# EAGLE board headstageNanoPolymerProbes (EAGLE 8.3.2)
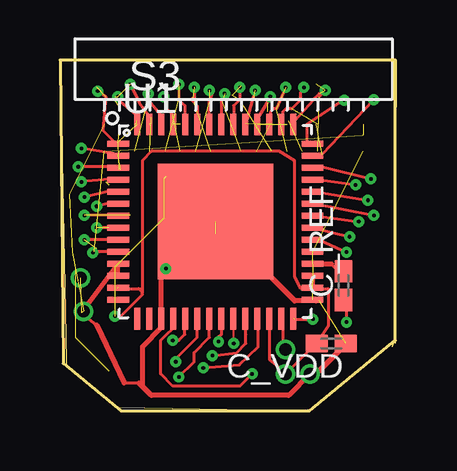
[diagram p0: board, top side]
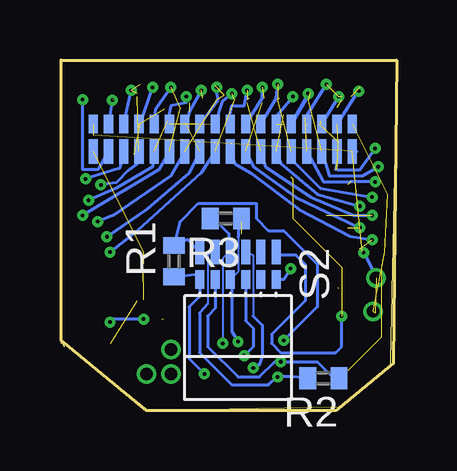
[diagram p1: board, bottom side, seen from below]

Size 14.02 x 14.6 mm. Coordinates in mm from the lower left corner, seen from the top.
Outline: 10.34,0 2.41,0.13 0.25,1.9 0.25,2.03 0,14.6
Outline: 10.34,0 13.89,2.87 13.84,2.67 13.97,2.92
Outline: 13.97,2.92 13.97,2.79 14.02,14.6 0,14.6
Outline: 0,14.6 0,14.6 13.97,14.6 13.97,2.92
Outline: 0,14.6 0.13,1.97 2.54,0 10.34,0
Outline: 10.34,0 10.41,0 13.97,2.92
Copper layers (1*16): Top 0.0178mm / dielectric 59mil / Bottom 0.0178mm
Design rules "default *": minimum track width 5mil, minimum drill 10mil, track to track 0.05588125mm, track to pad 5mil, pad to pad 5mil, via to via 5mil, smd to smd 5mil, copper to edge 10mil, drill to drill 16mil, minimum pad ring 6mil, minimum via ring 6mil, stop-mask expansion 3mil, vias tented up to drill 0mil, thermal gap 10mil

## Footprints (pad centres in the part's own frame; a part is rotated, then mirrored left to right if it is on the bottom)
C0402K = smd 0.925 x 0.74: 1 -0.6,0; 2 0.6,0
R0402 = smd 0.7 x 0.9: 1 -0.65,0; 2 0.65,0
OMNETICS_PZN-12-AA = smd 0.381 x 0.762: B1 1.587,-1.016; B2 0.953,-1.016; B3 0.318,-1.016; B4 -0.318,-1.016; B5 -0.953,-1.016; B6 -1.587,-1.016 | smd 0.381 x 1.016: T1 1.587,-2.159; T2 0.953,-2.159; T3 0.318,-2.159; T4 -0.318,-2.159; T5 -0.953,-2.159; T6 -1.587,-2.159
OMNETICS_A79025 = smd 0.381 x 0.762 bottom: B1 -5.397,-1.016; B2 -4.763,-1.016; B3 -4.128,-1.016; B4 -3.493,-1.016; B5 -2.857,-1.016; B6 -2.223,-1.016; B7 -1.587,-1.016; B8 -0.953,-1.016; B9 -0.318,-1.016; B10 0.318,-1.016; B11 0.953,-1.016; B12 1.587,-1.016; B13 2.223,-1.016; B14 2.857,-1.016; B15 3.493,-1.016; B16 4.128,-1.016; B17 4.763,-1.016; B18 5.397,-1.016 | smd 0.381 x 1.016 bottom: T1 -5.397,-2.159; T2 -4.763,-2.159; T3 -4.128,-2.159; T4 -3.493,-2.159; T5 -2.857,-2.159; T6 -2.223,-2.159; T7 -1.587,-2.159; T8 -0.953,-2.159; T9 -0.318,-2.159; T10 0.318,-2.159; T11 0.953,-2.159; T12 1.587,-2.159; T13 2.223,-2.159; T14 2.857,-2.159; T15 3.493,-2.159; T16 4.128,-2.159; T17 4.763,-2.159; T18 5.397,-2.159
QFN56_8_X_8_LARGE = smd 0.9 x 0.25: 1 -4.05,3.25; 2 -4.05,2.75; 3 -4.05,2.25; 4 -4.05,1.75; 5 -4.05,1.25; 6 -4.05,0.75; 7 -4.05,0.25; 8 -4.05,-0.25; 9 -4.05,-0.75; 10 -4.05,-1.25; 11 -4.05,-1.75; 12 -4.05,-2.25; 13 -4.05,-2.75; 14 -4.05,-3.25; 29 4.05,-3.25; 30 4.05,-2.75; 31 4.05,-2.25; 32 4.05,-1.75; 33 4.05,-1.25; 34 4.05,-0.75; 35 4.05,-0.25; 36 4.05,0.25; 37 4.05,0.75; 38 4.05,1.25; 39 4.05,1.75; 40 4.05,2.25; 41 4.05,2.75; 42 4.05,3.25 | smd 0.25 x 0.9: 15 -3.25,-4.05; 16 -2.75,-4.05; 17 -2.25,-4.05; 18 -1.75,-4.05; 19 -1.25,-4.05; 20 -0.75,-4.05; 21 -0.25,-4.05; 22 0.25,-4.05; 23 0.75,-4.05; 24 1.25,-4.05; 25 1.75,-4.05; 26 2.25,-4.05; 27 2.75,-4.05; 28 3.25,-4.05; 43 3.25,4.05; 44 2.75,4.05; 45 2.25,4.05; 46 1.75,4.05; 47 1.25,4.05; 48 0.75,4.05; 49 0.25,4.05; 50 -0.25,4.05; 51 -0.75,4.05; 52 -1.25,4.05; 53 -1.75,4.05; 54 -2.25,4.05; 55 -2.75,4.05; 56 -3.25,4.05 | smd 4.8 x 4.8: CENTER 0,0

## Placement (x,y rotation side)
C_REF  10nF  [C0402K]  11.81,5.21 90 top
C_VDD  10uF  [C0402K]  11.3,2.79 180 top
R1  100  [R0402]  9.27,6.22 90 bottom
R2  100  [R0402]  3.05,1.35 180 bottom
R3  100  [R0402]  7.11,8 180 bottom
S2  RHD2000-CABLE-AMP-SIDE  [OMNETICS_PZN-12-AA]  6.6,4.45 180 bottom
S3  OMNETICS_A79025  [OMNETICS_A79025]  7.24,12.95 0 top
U1  RHD2132_QFN  [QFN56_8_X_8_LARGE]  6.48,7.87 0 top

## Library data of the parts
C_REF C_VDD R1-R3 = resistor
S2 U1 = RHD2000
S3 = RHD2000b

## Nets
ADC_REF: C_REF.1 U1.28
AUXOUT: U1.27
CS+: R1.2 S2.T1 U1.19
CS-: R1.1 S2.B1 U1.18
GND: C_REF.2 C_VDD.1 S2.B6 S3.B1 S3.T18 U1.11 U1.12 U1.17 U1.29 U1.32 U1.33 U1.CENTER
IN0: S3.T9 U1.9
IN1: S3.T8 U1.8
IN2: S3.T7 U1.7
IN3: S3.T6 U1.6
IN4: S3.T5 U1.5
IN5: S3.T4 U1.4
IN6: S3.T3 U1.3
IN7: S3.T2 U1.2
IN8: S3.B2 U1.1
IN9: S3.B3 U1.56
IN10: S3.B4 U1.55
IN11: S3.B5 U1.54
IN12: S3.B6 U1.53
IN13: S3.B7 U1.52
IN14: S3.B8 U1.51
IN15: S3.B9 U1.50
IN16: S3.B10 U1.49
IN17: S3.B11 U1.48
IN18: S3.B12 U1.47
IN19: S3.B13 U1.46
IN20: S3.B14 U1.45
IN21: S3.B15 U1.44
IN22: S3.B16 U1.43
IN23: S3.B17 U1.42
IN24: S3.T17 U1.41
IN25: S3.T16 U1.40
IN26: S3.T15 U1.39
IN27: S3.T14 U1.38
IN28: S3.T13 U1.37
IN29: S3.T12 U1.36
IN30: S3.T11 U1.35
IN31: S3.T10 U1.34
MISO1+: S2.T4 U1.25
MISO1-: S2.B4 U1.24
MOSI+: R3.2 S2.T3 U1.23
MOSI-: R3.1 S2.B3 U1.22
REF: S3.B18 S3.T1 U1.10
SCLK+: R2.2 S2.T2 U1.21
SCLK-: R2.1 S2.B2 U1.20
VDD: C_VDD.2 S2.T6 U1.13 U1.26 U1.30 U1.31

## Tracks (layer width: path | path; a pad name or v marks a point on that pad's centre or on a via)
ADC_REF  (via drill 0.15)  (1 unrouted)
  Top 0.127: C_REF.1 11.97,4.61 11.81,4.57 12.06,4.57 11.94,4.45 v11.94,3.68 | 9.78,4.06 9.78,3.81 v10.54,3.81
  Bottom 0.127: v10.54,3.81 11.81,3.81 v11.94,3.68
AUXOUT  (via drill 0.51)
  Top 0.127: v9.4,2.54 9.27,2.54 9.27,3.43 9.23,3.47 U1.27
CS+  (via drill 0.15)
  Top 0.127: v4.7,2.92 4.95,2.92 5.21,3.18 5.21,3.8 U1.19
  Bottom 0.127: v4.7,2.92 3.3,4.32 3.3,6.1 4.7,7.49 5.33,7.49 5.84,8 5.84,8.64 8.25,8.64 9.02,7.87 R1.2 8.71,7.13 S2.T1
CS-  (via drill 0.15)
  Top 0.127: v8,1.52 7.49,1.02 4.7,1.02 4.19,1.52 4.19,2.92 4.44,3.18 4.7,3.41 U1.18
  Bottom 0.076: 8.21,5.7 S2.B1
  Bottom 0.127: 8.25,5.4 S2.B1 8.19,4.76 8.64,4.32 8.64,2.16 v8,1.52 | R1.1 8.21,5.7
GND  (via drill 0.15, 0.51, 0.51 pad 0.81)  (11 unrouted)
  Top 0.076: 10.67,1.52 11.81,2.67
  Top 0.127: 10.79,4.57 10.67,4.57 10.62,4.62 U1.29 | v4.41,5.91 4.95,6.1 4.7,6.1 6.48,7.37 | v4.41,5.91 4.44,5.59 4.19,5.59 4.32,5.71 | v4.41,5.91 4.32,5.71 | C_REF.2 11.59,5.81 11.3,6.1 | 4.23,3.46 U1.17 4.23,4.03 4.19,4.06 | v10.41,1.52 10.67,1.52 | C_VDD.1 11.78,2.63 | 1.52,3.56 0.89,4.06 | 3.3,1.14 2.67,1.14 | 4.44,5.84 4.32,5.71 | 10.54,6.1 10.55,6.1 U1.32 | U1.12 2.41,5.62
  Top 0.203: 10.67,4.57 9.78,4.57 8.38,5.97 | 4.23,3.46 3.43,2.67 3.43,1.02 | 11.78,2.63 10.67,1.52 | v10.41,1.52 9.52,0.63 3.81,0.63 3.43,1.02 | 3.43,1.02 3.3,1.14 | 1.52,3.56 2.67,1.14 | 4.19,5.59 4.19,4.06 | 2.41,5.62 2.41,6.1 0.89,4.06 | 11.3,6.1 10.55,6.1
  Bottom 0.127: S2.B6 4.7,5.46 v4.41,5.91
  other vias: 0.98,4.13 0.85,5.53
IN0  (via drill 0.15)  (1 unrouted)
  Top 0.127: v1.02,7.11 2.41,7.11 U1.9
  Bottom 0.127: S3.T9 6.73,10.29 6.1,9.91 4.06,8.38 1.92,7.25 v1.02,7.11
IN1  (via drill 0.15)  (2 unrouted)
  Top 0.127: v1.52,7.62 U1.8 | v5.59,13.46 5.59,12.83
  Bottom 0.127: S3.T8 5.97,10.16 4.19,8.89 v1.52,7.62
IN2  (via drill 0.15, 0.15 pad 0.15)  (2 unrouted)
  Top 0.127: v1.02,8.13 U1.7 | v6.22,13.33 6.35,13.21 6.22,12.83
  Bottom 0.127: S3.T7 5.46,10.16 3.56,8.89 1.78,8.13 v1.02,8.13
IN3  (via drill 0.15, 0.15 pad 0.15)  (1 unrouted)
  Top 0.127: v1.52,8.51 2.03,8.64 2.04,8.62 U1.6 | v4.32,13.08 4.44,12.83 4.44,12.57 4.7,12.32
  Bottom 0.127: S3.T6 4.83,10.29 3.3,9.02 v1.52,8.51
IN4  (via drill 0.15)  (1 unrouted)
  Top 0.127: v1.02,8.89 2.03,9.14 2.05,9.12 U1.5 | v4.95,13.59 4.95,12.95
  Bottom 0.127: 1.14,8.89 v1.02,8.89 3.17,9.27 4.32,10.41 S3.T5
IN5  (via drill 0.15)  (3 unrouted)
  Top 0.127: v0.89,9.53 2.29,9.65 2.31,9.62 U1.4 | v2.92,13.59 3.3,12.83 3.68,12.32
  Bottom 0.127: v0.89,9.53 1.92,9.53 3.05,9.53 S3.T4 | v2.92,13.59 3.81,12.19
  other vias: 2.41,13.08
IN6  (via drill 0.15)  (1 unrouted)
  Top 0.127: v0.76,10.16 2.16,10.16 2.19,10.12 U1.3 | v3.68,13.21 3.68,12.95
  Bottom 0.127: S3.T3 2.79,9.78 1.4,9.78 v0.76,10.16
IN7  (via drill 0.15)  (2 unrouted)
  Top 0.127: v0.89,10.92 2.38,10.67 U1.2 | v1.57,13.31 1.9,13.08
  Bottom 0.127: S3.T2 2.54,10.03
IN8  (2 unrouted)
  Bottom 0.127: S3.B2 1.51,13.45 | 2.48,10.03 1.52,10.03 0.89,10.92
IN9  (8 unrouted)
  Top 0.127: U1.56 3.17,11.98 3.17,12.32 2.29,13.08 | 1.9,13.08 1.78,11.68 2.29,11.18 2.41,11.18
  Bottom 0.127: S3.B3 2.41,13.08
IN10  (1 unrouted)
IN11  (1 unrouted)
  Top 0.127: 3.68,12.95 4.19,12.32 4.19,11.96 U1.54
  Bottom 0.152: 3.62,13.27 S3.B5
IN12  (1 unrouted)
  Bottom 0.127: S3.B6 5.02,12.26 4.32,13.08
IN13  (2 unrouted)
  Top 0.127: 4.95,12.95 5.21,12.7 5.21,12.07 U1.52
  Bottom 0.127: S3.B7 5.02,13.02 4.95,13.59
IN14  (1 unrouted)
  Top 0.127: 5.52,13.02 5.46,12.95 5.71,12.7 5.71,11.94 U1.51
  Bottom 0.127: S3.B8 5.59,13.02 5.59,13.46
IN15  (2 unrouted)
  Top 0.127: 6.22,12.95 U1.50
  Bottom 0.127: S3.B9 6.98,12 6.86,12.7 6.35,12.7 6.22,13.33
IN16  (2 unrouted)
  Top 0.127: 6.73,12.95 U1.49
  Bottom 0.127: S3.B10 7.24,12.89 6.86,13.21
IN17  (2 unrouted)
  Top 0.127: 7.49,12.95 7.24,12.7 7.24,11.94 U1.48
  Bottom 0.127: S3.B11 7.43,12.95 7.56,13.53
IN18  (2 unrouted)
  Top 0.127: 8.13,13.33 8,12.95 7.75,11.94 U1.47
IN19  (1 unrouted)
IN20  (1 unrouted)
  Top 0.127: 9.02,12.57 8.89,12.57 8.76,12.45 8.76,11.96 U1.45
  Bottom 0.127: S3.B14 10.03,12.57 9.4,13.46
IN21  (1 unrouted)
  Top 0.127: U1.44 9.23,12.15 9.27,12.19 9.27,12.45 9.4,12.57 9.65,12.57 10.03,12.95 10.03,13.27
IN22  (2 unrouted)
  Top 0.127: U1.43 9.73,12.27 9.78,12.06 10.79,13.21 10.6,13.02
  Bottom 0.127: S3.B16 11.05,13.33
IN23  (via drill 0.15 pad 0.46)  (1 unrouted)
  Top 0.127: 11.81,12.95 10.29,11.94 10.29,11.18 10.34,11.12 U1.42
  Bottom 0.127: v11.84,12.94 S3.B17
  Bottom 0.152: 11.81,13.08 11.81,12.96 v11.84,12.94
IN24  (via drill 0.15)  (1 unrouted)
  Top 0.127: v13.08,12.95 10.92,10.67 10.88,10.62 U1.41 | 10.16,13.59 v10.16,13.46
  Bottom 0.127: 10.67,11.94 v10.16,13.46 | S3.T17 12.45,10.03 13.08,10.03 v13.08,12.95
IN25  (via drill 0.15)
  Top 0.127: v12.95,9.65 10.92,10.16 10.89,10.12 U1.40
  Bottom 0.127: S3.T16 11.54,10.08 v12.95,9.65
IN26  (via drill 0.15)  (1 unrouted)
  Top 0.127: v12.32,9.4 10.55,9.65 U1.39 | v11.05,13.33 10.79,13.08
  Bottom 0.127: S3.T15 10.79,10.29 11.18,10.01 11.67,9.5 v12.32,9.4
IN27  (via drill 0.15)  (1 unrouted)
  Top 0.127: v12.83,8.76 10.55,9.14 U1.38
  Bottom 0.127: v8.76,13.08 8.76,12.83 9.4,12.7 9.52,12.06 9.4,12.06 | S3.T14 10.16,10.16 11.68,9.27 v12.83,8.76
IN28  (via drill 0.15)  (1 unrouted)
  Top 0.127: v13.08,8.13 10.54,8.64 U1.37 | v9.4,13.46 9.02,12.57
  Bottom 0.127: S3.T13 9.91,10.03 v13.08,8.13
IN29  (via drill 0.15)  (1 unrouted)
  Top 0.127: v12.45,7.87 U1.36 | v7.49,13.46 7.49,12.95
  Bottom 0.127: S3.T12 9.4,9.78 11.81,8.13 v12.45,7.87
IN30  (via drill 0.15)  (2 unrouted)
  Top 0.127: v12.06,7.24 U1.35 | 8.25,12.19 8.64,12.83 8.76,13.08
  Bottom 0.127: v8.13,13.33 8.64,12.45 8.76,11.94 | S3.T11 8.64,9.91 10.41,8.38 v12.06,7.24
IN31  (via drill 0.15)  (1 unrouted)
  Top 0.127: v11.94,6.6 10.79,7.11 10.78,7.12 U1.34 | v6.86,13.21 6.73,12.95
  Bottom 0.127: S3.T10 8.13,9.91 10.79,7.49 v11.94,6.6
MISO1+  (via drill 0.15)
  Top 0.076: 8.25,3.43 U1.25
  Top 0.127: v5.97,1.78 7.48,1.9 8.25,2.65 8.25,3.43
  Bottom 0.076: S2.T4 6.22,6.6 5.97,6.48 5.97,3.94
  Bottom 0.127: 5.97,3.94 5.59,3.56 5.59,2.29 5.71,1.9 v5.97,1.78
MISO1-  (via drill 0.15)
  Top 0.127: v6.35,2.29 7.37,2.41 7.75,2.79 7.75,3.18 U1.24
  Bottom 0.127: S2.B4 6.29,3.75 5.97,3.43 5.97,2.67 v6.35,2.29
MOSI+  (via drill 0.15)
  Top 0.076: v7.24,2.79 7.24,3.68
  Top 0.127: 7.24,3.68 7.24,3.81 U1.23
  Bottom 0.076: 6.86,6.48 7.11,6.48 7.24,6.35 v7.24,2.79 | 6.98,6.67 S2.T3
  Bottom 0.127: S2.T3 6.86,6.48 | R3.2 7.62,8 6.98,7.37 6.98,6.67
MOSI-  (via drill 0.15)
  Top 0.076: 6.73,3.76 6.73,3.68
  Top 0.127: v6.6,2.87 6.6,3.05 6.73,3.18 6.73,3.76 U1.22
  Bottom 0.076: R3.1 6.59,7.89 | 6.6,7.24 6.6,5.78 S2.B3
  Bottom 0.127: S2.B3 6.98,5.4 6.86,5.4 6.86,3.3 v6.6,2.87 | 6.59,7.89 6.6,7.24
N$2  (2 unrouted)
REF  (via drill 0.15)  (4 unrouted)
  Top 0.127: U1.10 1.42,6.62 v1.37,6.58
  Bottom 0.127: v1.37,6.58 0.79,5.44 | S3.T1 1.65,10.79
SCLK+  (via drill 0.15)
  Top 0.076: 6.22,3.43 U1.21
  Top 0.127: v4.95,1.4 5.59,2.03 5.59,2.41 6.22,3.05 6.22,3.43
  Bottom 0.076: S2.T2 7.75,6.6 7.87,6.48 7.87,4.45
  Bottom 0.127: 7.87,4.45 8.2,4.06 8.2,2.41 6.86,1.07 5.33,1.07 v4.95,1.4 4.32,1.4 R2.2
SCLK-  (via drill 0.15)
  Top 0.127: v4.83,2.03 4.83,2.16 5.71,3.05 5.71,3.68 5.73,3.7 U1.20
  Bottom 0.127: S2.B2 7.56,4.25 7.87,3.94 7.87,2.67 6.6,1.4 5.71,1.4 5.08,2.03 v4.83,2.03 3.3,2.03 2.62,1.35 R2.1
VDD  (via drill 0.15, 0.51)  (5 unrouted)
  Top 0.127: 2.41,5.08 3.28,5.08 | v2.29,3.94 2.54,3.94 3.43,4.83 3.43,4.93 | U1.26 8.73,2.12 9.14,1.78 v9.4,1.52 10.67,2.79 C_VDD.2 11.18,3.52 11.18,5.08 10.48,5.08 | 10.48,5.08 10.03,5.08 9.78,5.59 9.78,10.41 9.14,10.79 3.81,10.79 3.43,10.41 3.43,5.08 | 10.48,5.08 U1.30 | 3.43,5.08 3.43,4.93 | 3.43,4.93 3.28,5.08 | 3.28,5.08 3.43,5.08
  Top 0.203: U1.30 U1.31
  Bottom 0.076: 5.02,7.05 5.02,6.67
  Bottom 0.127: 5.02,7.05 S2.T6 4.89,6.48 4.19,6.48 3.81,6.1 3.81,4.57 5.21,3.18 5.21,2.79 4.83,2.41 2.54,2.41 2.29,2.67 v2.29,3.94